# EAGLE board Digpot controll (EAGLE 8.1.0)
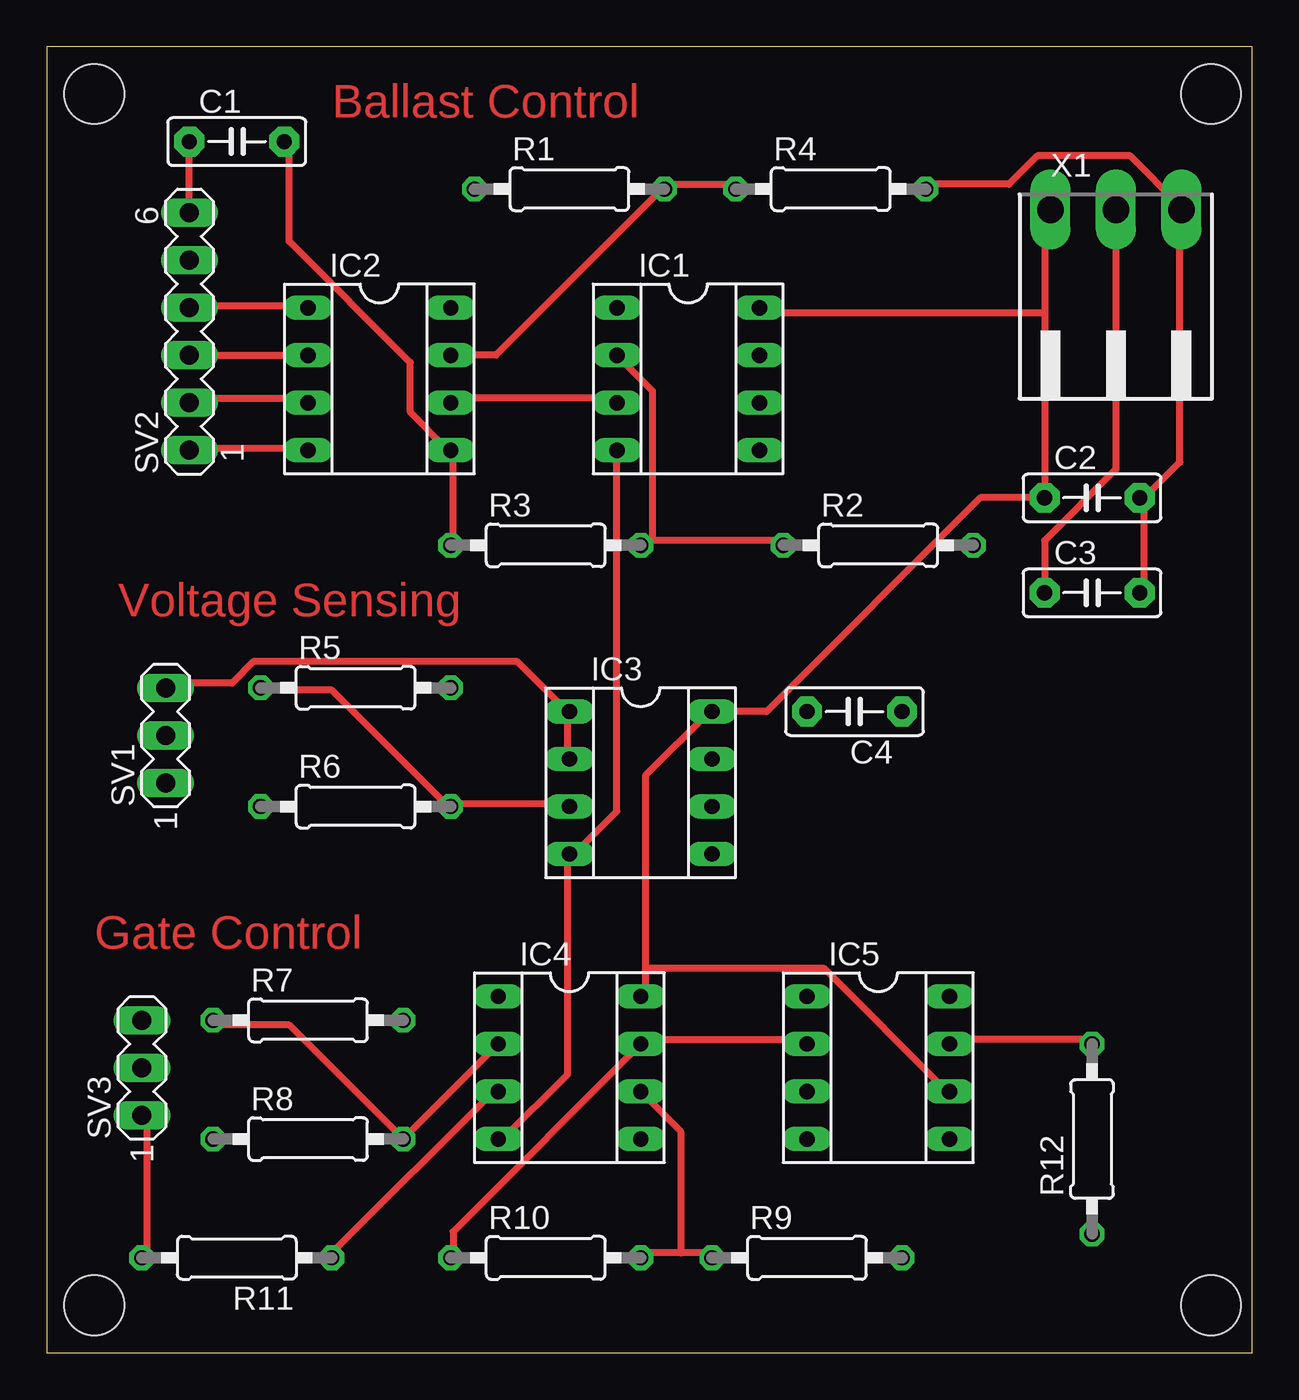
[diagram p0: board, top side]
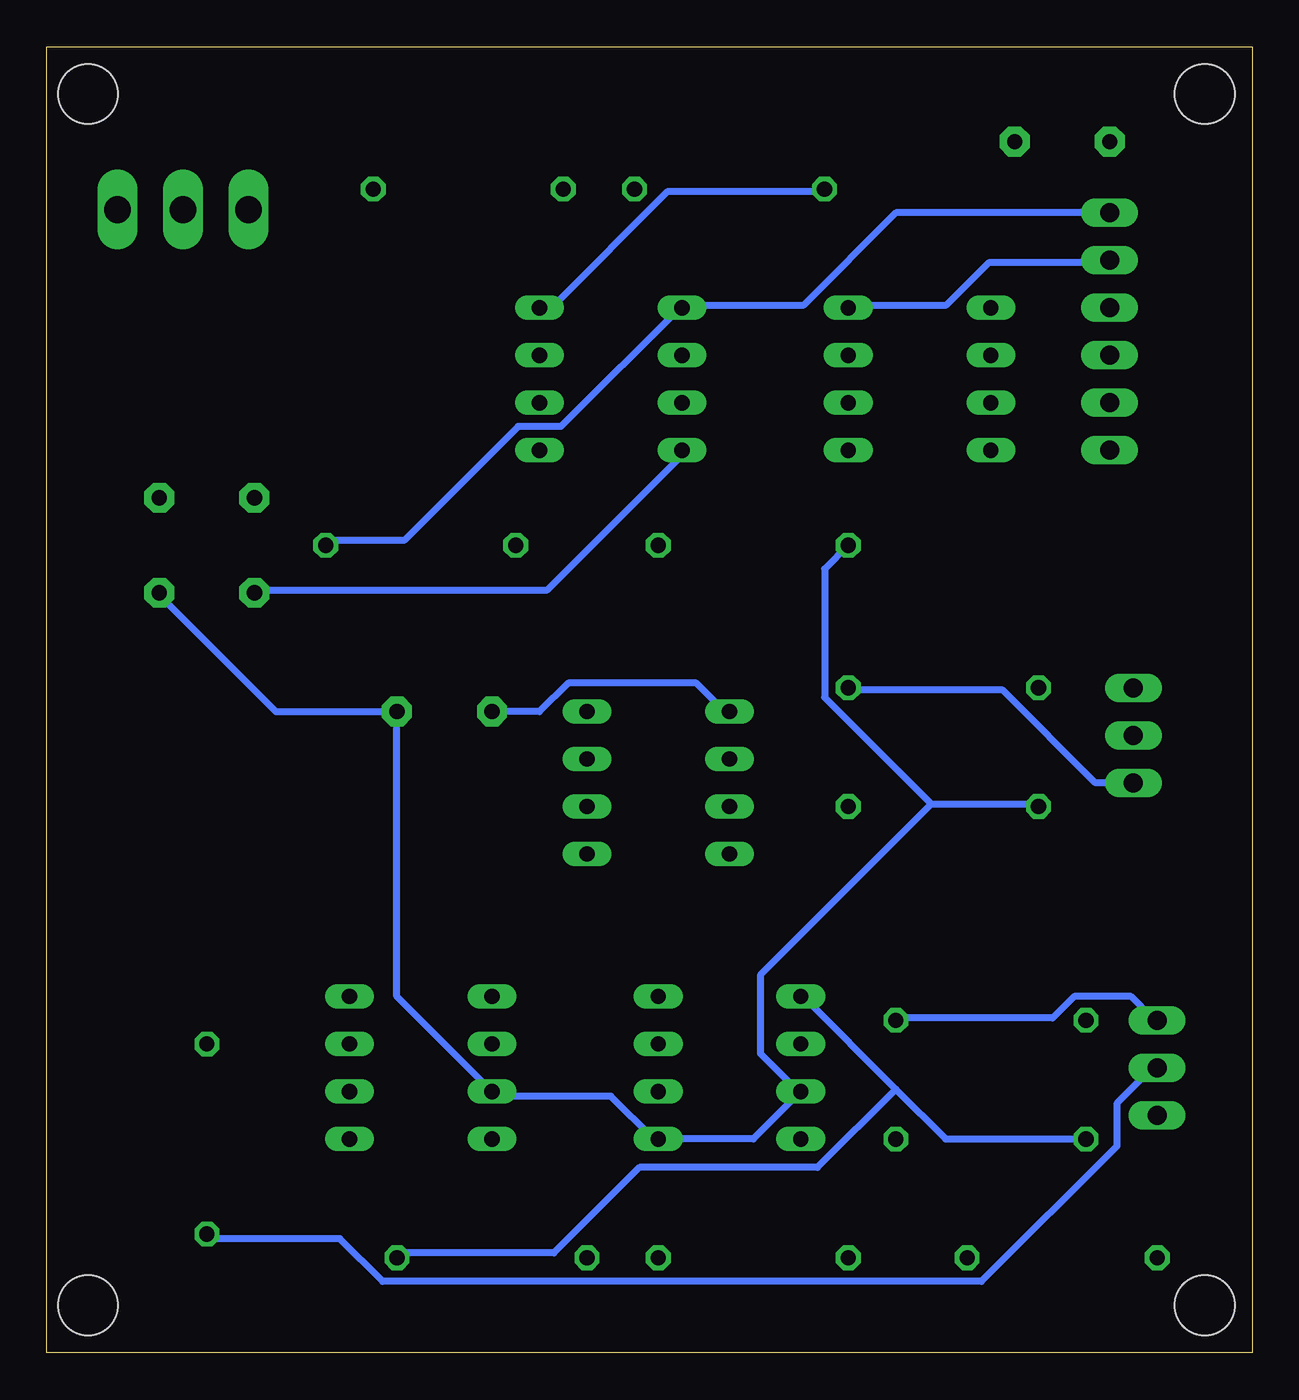
[diagram p1: board, bottom side, seen from below]

Size 64.44 x 69.84 mm. Coordinates in mm from the lower left corner, seen from the top.
Outline: 0,0 64.44,0 64.44,69.84 0,69.84 0,0
Copper layers (1*16): Top 0.035mm / dielectric 1.5mm / Bottom 0.035mm
Design rules "default": minimum track width 10mil, minimum drill 24mil, track to track 8mil, track to pad 8mil, pad to pad 8mil, via to via 8mil, smd to smd 8mil, copper to edge 40mil, drill to drill 8mil, minimum pad ring 10mil, minimum via ring 8mil, stop-mask expansion 4mil, vias tented up to drill 0mil, thermal gap 10mil
Net classes: 0 default: width 0.381 mm, drill 0.559 mm, clearance 0.381 mm
Holes 3.2 mm at 62.23,67.31 2.54,2.54 62.23,2.54 2.54,67.31

## Footprints (pad centres in the part's own frame; a part is rotated, then mirrored left to right if it is on the bottom)
C5B2.5 = drill 0.813 pad 1.6 octagon: 1 -2.54,0; 2 2.54,0
SOCKET-08 = drill 0.813 long: 1 -3.81,-3.81; 2 -1.27,-3.81; 3 1.27,-3.81; 4 3.81,-3.81; 5 3.81,3.81; 6 1.27,3.81; 7 -1.27,3.81; 8 -3.81,3.81
0207/10 = drill 0.813 octagon: 1 -5.08,0; 2 5.08,0
MA03-1 = drill 1.016 long: 1 -2.54,0; 2 0,0; 3 2.54,0
MA06-1 = drill 1.016 long: 1 -6.35,0; 2 -3.81,0; 3 -1.27,0; 4 1.27,0; 5 3.81,0; 6 6.35,0
90-3 = drill 1.422 long: 1 -3.5,5.25; 2 0,5.25; 3 3.5,5.25

## Placement (x,y rotation side)
C1  [C5B2.5]  10.16,64.77 0 top
C2  [C5B2.5]  55.88,45.72 0 top
C3  [C5B2.5]  55.88,40.64 0 top
C4  [C5B2.5]  43.18,34.29 180 top
IC1  [SOCKET-08]  34.29,52.07 270 top
IC2  [SOCKET-08]  17.78,52.07 270 top
IC3  [SOCKET-08]  31.75,30.48 270 top
IC4  [SOCKET-08]  27.94,15.24 270 top
IC5  [SOCKET-08]  44.45,15.24 270 top
R1  [0207/10]  27.94,62.23 0 top
R2  [0207/10]  44.45,43.18 0 top
R3  [0207/10]  26.67,43.18 0 top
R4  [0207/10]  41.91,62.23 0 top
R5  [0207/10]  16.51,35.56 0 top
R6  [0207/10]  16.51,29.21 0 top
R7  [0207/10]  13.97,17.78 0 top
R8  [0207/10]  13.97,11.43 0 top
R9  [0207/10]  40.64,5.08 0 top
R10  [0207/10]  26.67,5.08 0 top
R11  [0207/10]  10.16,5.08 180 top
R12  [0207/10]  55.88,11.43 90 top
SV1  [MA03-1]  6.35,33.02 90 top
SV2  [MA06-1]  7.62,54.61 90 top
SV3  [MA03-1]  5.08,15.24 90 top
X1  [90-3]  57.15,55.88 0 top

## Library data of the parts
C1-C4 = capacitor-wima
IC1-IC5 = ic-package
R1 = eagle-ltspice; SPICEMODEL: 2.425k; SPICEPREFIX: R
R2 = eagle-ltspice; SPICEMODEL: 0.5k; SPICEPREFIX: R
R3 = eagle-ltspice; SPICEMODEL: 0.8k; SPICEPREFIX: R
R4 = eagle-ltspice; SPICEMODEL: 11.29k; SPICEPREFIX: R
R5 = rcl; RR: 1.5M
R6 = rcl; RR2: 100k
R7-R11 = rcl
R12 = resistor
SV1-SV3 = con-lstb; OC_FARNELL: unknown; OC_NEWARK: unknown
X1 = con-weidmueller-sl35; OC_FARNELL: unknown; OC_NEWARK: unknown

## Nets
GND: C1.2 C2.2 C3.2 C4.1 IC2.5 IC4.3 IC4.5 IC5.3 R3.1 R4.2 R6.1 R11.1 X1.3
N$1: IC1.2 R2.1 R3.2
N$2: IC1.3 IC2.6
N$3: IC2.1 SV2.4
N$4: C1.1 IC1.1 R2.2 SV2.6
N$5: IC2.7 R1.2 R4.1
N$6: IC2.2 SV2.3
N$7: IC2.3 SV2.2
N$8: IC2.4 SV2.1
N$9: IC3.3 R5.1 R6.2
N$12: IC2.8 SV2.5
N$14: C4.2 IC3.1 IC3.2 SV1.3
N$15: R5.2 SV1.1
N$18: R7.2 SV3.3
N$19: IC4.2 R7.1 R8.2
N$20: IC4.1 R8.1 R9.2
N$21: IC4.6 R9.1 R10.2
N$22: IC4.7 IC5.2 R10.1
N$24: R11.2 SV3.1
S$1: IC5.7 R12.2
S$2: R12.1 SV3.2
VCC: C2.1 IC1.8 IC3.8 IC4.8 IC5.6 R1.1 X1.1
VSS: C3.1 IC1.4 IC3.4 IC4.4 X1.2

## Tracks (layer width: path | path; a pad name or v marks a point on that pad's centre or on a via)
GND
  Top 0.381: R4.2 47.24,62.48 51.44,62.48 52.96,64.01 57.91,64.01 60.58,61.34 X1.3 60.58,60.96 60.58,47.62 58.67,45.72 | 58.67,45.72 58.67,40.77 C3.2 | 58.67,45.72 C2.2 | R11.1 15.24,5.33 24,14.1 IC4.3 | R3.1 21.72,43.43 21.72,48.01 IC2.5 21.34,48.39 19.43,50.29 19.43,52.96 12.95,59.44 12.95,64.77 C1.2
  Bottom 0.381: C3.2 58.29,40.39 52.2,34.29 C4.1 45.72,19.05 IC5.3 40.39,13.72 34.29,13.72 32,11.43 IC4.5 26.67,11.43 IC4.3 24.38,14.1 26.29,16 26.29,20.19 17.14,29.34 | 17.14,29.34 11.43,29.34 R6.1 | 17.14,29.34 22.86,35.05 22.86,41.91 R3.1
N$1
  Top 0.381: 32.38,43.43 39.24,43.43 R2.1 | 32.38,43.43 32,43.43 R3.2 32.38,43.43 | IC1.2 32.38,51.44 32.38,43.43
N$2
  Top 0.381: IC2.6 21.72,51.05 30.48,51.05 IC1.3
N$3
  Top 0.381: IC2.1 13.72,56.01 7.62,56.01 SV2.4
N$4
  Top 0.381: SV2.6 C1.1
  Bottom 0.381: 30.48,56.01 24,56.01 19.05,60.96 SV2.6 | 30.48,56.01 36.96,49.53 39.24,49.53 45.34,43.43 49.53,43.43 R2.2 | 30.48,56.01 IC1.1
N$5
  Top 0.381: IC2.7 24,53.34 32.77,62.1 R1.2 33.15,62.48 36.58,62.48 R4.1
N$6
  Top 0.381: SV2.3 IC2.2
N$7
  Top 0.381: IC2.3 13.72,51.05 7.62,51.05 SV2.2
N$8
  Top 0.381: IC2.4 13.72,48.39 7.62,48.39 SV2.1
N$9
  Top 0.381: IC3.3 27.81,29.34 21.72,29.34 R6.2 21.34,29.34 15.24,35.43 11.43,35.43 R5.1
N$12
  Bottom 0.381: IC2.8 21.34,56.01 16.38,56.01 14.1,58.29 7.62,58.29 SV2.5
N$14
  Top 0.381: 27.81,34.29 27.81,32 IC3.2 | 27.81,34.29 25.15,36.96 11.05,36.96 9.91,35.81 6.48,35.81 SV1.3 | 27.81,34.29 IC3.1
  Bottom 0.381: C4.2 38.1,34.29 36.58,35.81 29.72,35.81 28.19,34.29 IC3.1
N$15
  Bottom 0.381: SV1.1 8.38,30.48 13.34,35.43 21.34,35.43 R5.2
N$18
  Bottom 0.381: R7.2 19.05,17.91 10.67,17.91 9.53,19.05 6.48,19.05 5.33,17.91 SV3.3
N$19
  Top 0.381: IC4.2 R8.2 12.95,17.53 9.14,17.53 R7.1
N$20
  Bottom 0.381: R8.1 16.38,11.43 19.05,14.1 | 19.05,14.1 24,19.05 IC4.1 | 19.05,14.1 23.24,9.91 32.77,9.91 37.34,5.33 45.72,5.33 R9.2
N$21
  Top 0.381: 33.91,5.33 35.43,5.33 R9.1 | 33.91,5.33 32,5.33 R10.2 | IC4.6 33.91,11.81 33.91,5.33
N$22
  Top 0.381: R10.1 21.72,5.33 21.72,6.48 IC4.7 32,16.76 40.39,16.76 IC5.2
N$24
  Top 0.381: R11.2 5.33,5.33 5.33,12.57 SV3.1
S$1
  Top 0.381: IC5.7 48.39,16.76 55.63,16.76 R12.2
S$2
  Bottom 0.381: R12.1 55.63,6.1 48.77,6.1 46.48,3.81 14.48,3.81 7.24,11.05 7.24,13.34 5.33,15.24 SV3.2
VCC
  Top 0.381: 32,20.57 32,30.86 35.43,34.29 IC3.8 38.48,34.29 49.91,45.72 C2.1 53.34,55.63 | 32,20.57 32,19.05 IC4.8 | 32,20.57 41.53,20.57 48.01,14.1 IC5.6 | 53.34,55.63 53.34,60.96 X1.1 | 53.34,55.63 38.1,55.63 IC1.8
  Bottom 0.381: R1.1 22.86,62.1 31.24,62.1 37.34,56.01 38.1,56.01 IC1.8
VSS
  Top 0.381: C3.1 53.34,43.43 57.15,47.24 X1.2 | IC4.4 24.38,11.43 27.81,14.86 27.81,26.67 IC3.4 28.19,26.67 30.48,28.96 IC1.4
  Bottom 0.381: C3.1 53.34,40.77 37.72,40.77 30.48,48.01 IC1.4

## Text on the board
Top: Ballast Control | Voltage Sensing | Gate Control